# Altium PCB PCB_Project.PcbDoc
Units mil, origin at the board's own origin, x right, y up, seen from the top; angles counter-clockwise.
Board outline 2435 x 1745 mil, 2 copper layers (Top Layer, Bottom Layer); 17 components, 7 nets, 39 pads, 0 vias.
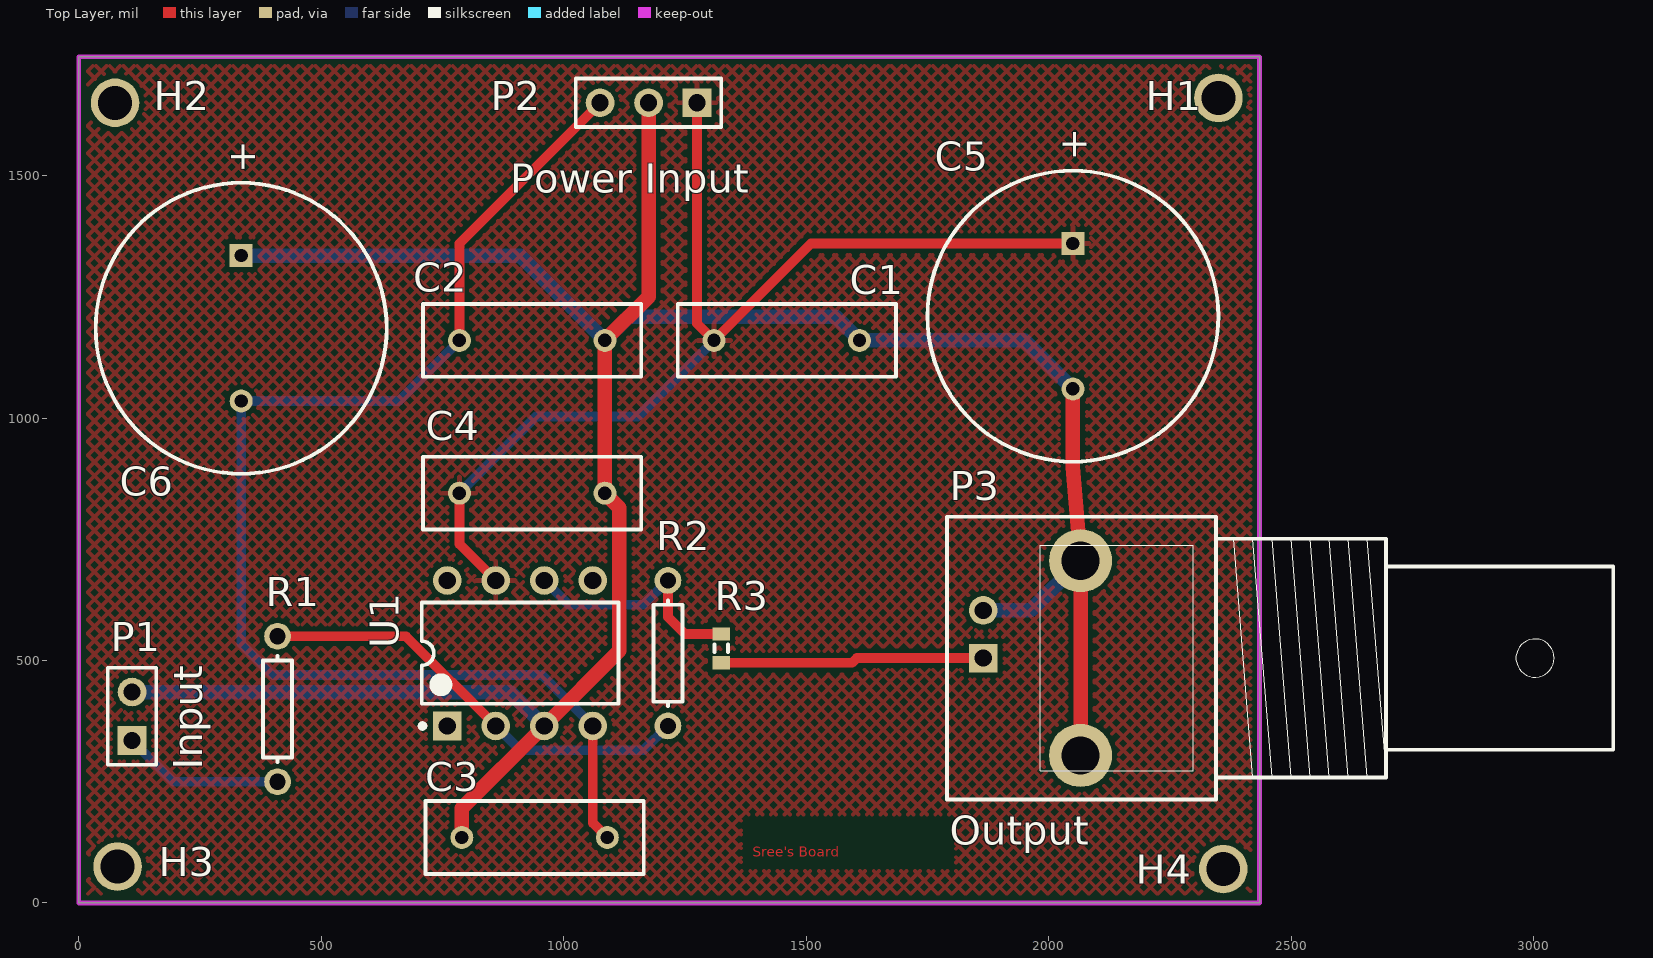
[diagram p0: Top Layer view]
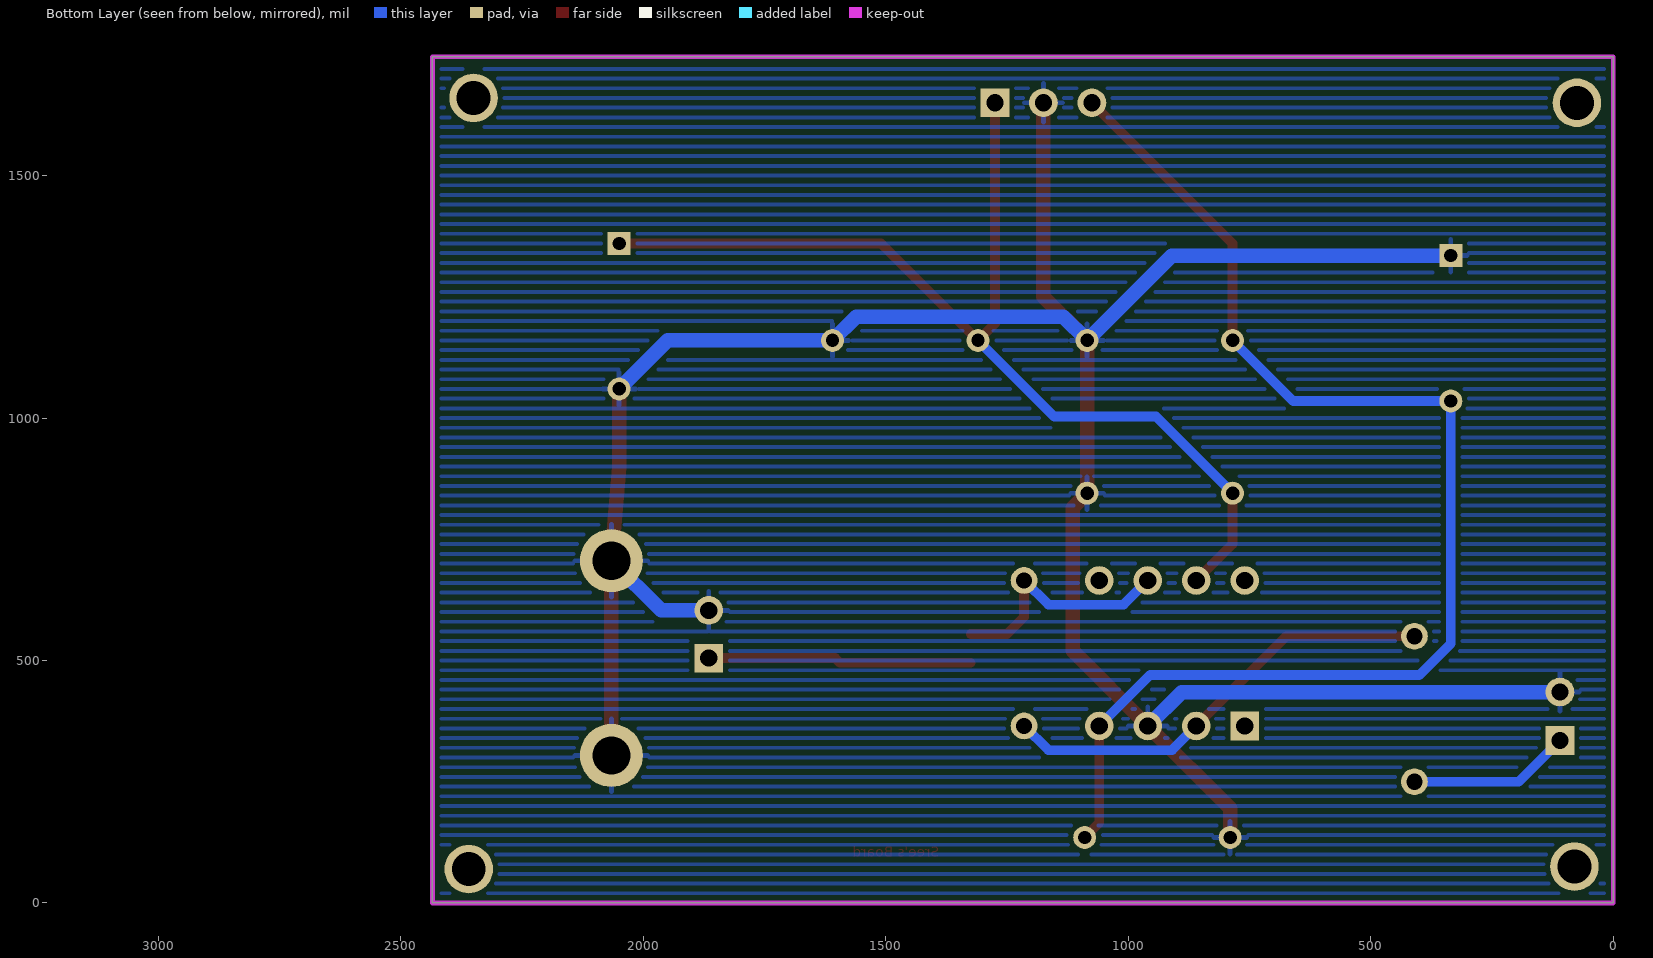
[diagram p1: Bottom Layer view, seen from below]

## Layer stack, top to bottom
Top Solder: solder mask 0.4, Solder Resist, Dk 3.5
Top Layer: signal copper 1.4
Dielectric 1: dielectric 12.6, FR-4, Dk 4.8
Bottom Layer: signal copper 1.4
Bottom Solder: solder mask 0.4, Solder Resist, Dk 3.5

## Board outline
0,0 2435,0 2435,1745 0,1745

## Design rules (kind name [scope] priority, off if disabled: settings)
Clearance Clearance_1 [All] p1: gap=10 ignorepadtopadclearanceinfootprint=FALSE
PolygonConnect [All] p1: connectstyle=Relief reliefconductorwidth=10 reliefentries=4 polygonreliefangle="90 Angle" airgapwidth=10
RoutingVias [All] p1: holewidth=28 width=50 viastyle="Through Hole" minholewidth=28 minwidth=50 maxholewidth=28 maxwidth=50
SolderMaskExpansion [All] p1: expansion=4 istentingtop=FALSE
SupplyNets "Schematic Supply Nets_2" [InNet('-9VDC')] p1: voltage=0.000
SupplyNets "Schematic Supply Nets_1" [InNet('GND')] p2: voltage=0.000
SupplyNets "Schematic Supply Nets" [InNet('+9VDC')] p3: voltage=0.000
Width "Schematic Width Constraint" [InNet('GND')] p1: maxlimit=30 minlimit=30 preferedwidth=30 minimp=50.000000 maximp=50.000000 favimp=50.000000
Width [All] p2: maxlimit=20 minlimit=20 preferedwidth=20 minimp=50.000000 maximp=50.000000 favimp=50.000000
30 further rules are at their usual default settings.

## Components (designator, comment, footprint, x,y, rotation, side; value= is the part's Value field where it differs from the comment)
C1 "Cap" RAD-0.3 1460,1160 r0 top value=100nF
C2 "Cap" RAD-0.3 935,1160 r0 top value=100nF
C3 "Cap" RAD-0.3 940,135 r0 top value=100nF
C4 "Cap" RAD-0.3 935,845 r180 top value=100nF
C5 "Cap Pol1" RB7.6-15 2050,1210 r90 top value=100pF
C6 "Cap Pol1" RB7.6-15 335,1185 r90 top value=100pF
H1 "Hole 3mm" "Hole 3mm" 2740,1485 r0 top
H2 "Hole 3mm" "Hole 3mm" 465,1475 r0 top
H3 "Hole 3mm" "Hole 3mm" 470,-100 r0 top
H4 "Hole 3mm" "Hole 3mm" 2750,-105 r0 top
P1 "Input" HDR1X2 110,335 r90 top
P2 "Power Input" HDR1X3 1275,1650 r180 top
P3 "Output" "BNC_RA CON" 1865,505 r180 top
R1 "Res1" AXIAL-0.3 410,400 r90 top value=1K
R2 "Res1" AXIAL-0.3 1215,515 r90 top value=10K
R3 "Res3" J1-0603 1325,525 r270 top value=50
U1 "LM741" DIP-8 910,515 r90 top

## Footprints (in the part's own frame and the unit in brackets; to place one, negate y for a bottom-side part, rotate by r counter-clockwise, add the part's x,y. Pads: shape width x height; smd on the part's side, far side on the other; paste and mask are expansions set on the pad)
AXIAL-0.3 [mm] "Axial Device, Thru-Hole; 2 Leads; 0.3 in Pin Spacing"
  round 1.4 hole 0.85: 1(-3.81,0) 2(3.81,0)
  silkscreen extent -2.77,-0.76 2.77,0.76
"BNC_RA CON" [mm] "Connector; BNC Elbow"
  rect 1.5x1.5 hole 0.9: 1(0,0)
  round 3.3 hole 2: 2(-5.1,5.1) 2(-5.1,-5.1)
  round 1.5 hole 0.9: 2(0,-2.5)
  silkscreen extent -33,-7.4 1.9,7.4
DIP-8 [mm]
  rect 1.5x1.5 hole 0.9: 1(-3.81,3.81)
  round 1.5 hole 0.9: 2(-3.81,1.27) 3(-3.81,-1.27) 4(-3.81,-3.81) 5(3.81,-3.81) 6(3.81,-1.27) 7(3.81,1.27) 8(3.81,3.81)
  silkscreen extent -3.93,-5.15 2.65,5.23, body extent -3.6,-5.15 3.6,5.15, height 5.08
HDR1X2 [mm] "Connector; Header; 2 Position"
  rect 1.5x1.5 hole 0.9: 1(0,0)
  round 1.5 hole 0.9: 2(2.54,0)
  silkscreen extent -1.27,-1.27 3.81,1.27
HDR1X3 [mm] "Connector; Header; 3 Position"
  rect 1.5x1.5 hole 0.9: 1(0,0)
  round 1.5 hole 0.9: 2(2.54,0) 3(5.08,0)
  silkscreen extent -1.27,-1.27 6.35,1.27
"Hole 3mm" [mil]
  round 100 hole 70: 1(-390,175)
J1-0603 [mm] "Chip Resistor, Body 1.6x0.8mm, IPC High Density"
  rect 0.7x0.9 smd: 1(-0.75,0) 2(0.75,0)
  silkscreen extent -0.2,-0.35 0.2,0.35, body extent -0.85,-0.48 0.85,0.48, height 0.9
RAD-0.3 [mm] "Radial Cap, Thru-Hole; 2 Leads; 0.3 in Pin Spacing"
  round 1.2 hole 0.7: 1(-3.81,0) 2(3.81,0)
  silkscreen extent -5.71,-1.91 5.71,1.91
RB7.6-15 [mm] "Polarized Capacitor (Radial); 2 Leads"
  rect 1.2x1.2 hole 0.7: 1(3.81,0)
  round 1.2 hole 0.7: 2(-3.81,0)
  silkscreen extent -7.62,-7.62 7.62,7.62

## Part data
C1 C2 C3 C4: "Capacitor", LatestRevisionDate=17-Jul-2002, LatestRevisionNote="Re-released for DXP Platform.", PackageDescription="Radial Cap, Thru-Hole; 2 Leads; 0.3 in Pin Spacing", PackageReference=RAD-0.3, Published=8-Jun-2000, Publisher="Altium Limited"
C5 C6: "Polarized Capacitor (Radial)", LatestRevisionDate=17-Jul-2002, LatestRevisionNote="Re-released for DXP Platform.", PackageDescription="Polarized Capacitor (Radial); 2 Leads", PackageReference=RB7.6-15, Published=8-Jun-2000, Publisher="Altium Limited"
P1: library part "Header 2", "Header, 2-Pin", LatestRevisionDate=17-Jul-2002, LatestRevisionNote="Re-released for DXP Platform.", Publisher="Altium Limited"
P2: library part "Header 3", "Header, 3-Pin", LatestRevisionDate=17-Jul-2002, LatestRevisionNote="Re-released for DXP Platform.", Publisher="Altium Limited"
P3: library part BNC, "BNC Elbow Connector", LatestRevisionDate=17-Jul-2002, LatestRevisionNote="Re-released for DXP Platform.", Publisher="Altium Limited"
R1 R2 R3: "Resistor", Published=8-Jun-2000, Publisher="Altium Limited"
  R1 R2: LatestRevisionDate=17-Jul-2002, LatestRevisionNote="Re-released for DXP Platform.", PackageDescription="Axial Device, Thru-Hole; 2 Leads; 0.3 in Pin Spacing", PackageReference=AXIAL-0.3
  R3: LatestRevisionDate=29-May-2009, LatestRevisionNote="IPC-7351 Footprint Added.", PackageDescription="Chip Resistor", PackageReference=J1-0603
U1: library part "Op Amp", "FET Operational Amplifier", ComponentLink1Description="Manufacturer Link", ComponentLink1URL=http://www.analog.com/, DatasheetVersion="REV. B", LatestRevisionDate=17-Jul-2002, LatestRevisionNote="Re-released for DXP Platform.", PackageDescription="Can; 8 Leads; Pin Circle Dia. 5.08 mm; Lead Dia. 0.53 mm (max)", PackageReference=H-08A, PackageVersion=1990, Published=8-Jun-2000, Publisher="Altium Limited"

## Nets (pads, with @x,y where several pads share a name; then routed paths per layer and width w, separated by ;. In a path a pad name is that pad's centre, name@x,y a point inside that pad or via, vN(x,y) a via of type N, cw(c..) or ccw(c..) an arc to the next point about the centre after c; other vN are vias at no path point)
+9VDC: C1.1 C4.2 C5.1 P2.1 U1.7 | length 2193.9
  Top Layer w20: C4.2 785,740 U1.7 ; P2.1 1275,1195 C1.1 1510,1360 C5.1
  Bottom Layer w20: C4.2 943,1003 1153,1003 C1.1
-9VDC: C2.1 C3.2 C6.2 P2.3 U1.4 | length 2649.7
  Top Layer w20: C2.1 785,1360 P2.3 ; U1.4 1060,165 C3.2
  Bottom Layer w20: C2.1 660,1035 C6.2 335,535 400,470 955,470 U1.4
GND: C1.2 C2.2 C3.1 C4.1 C5.2 C6.1 P1.2 P2.2 P3.2 U1.3 | length 5447.4
  Top Layer w30: C3.1 790,195 U1.3 1115,520 1115,815 C4.1 C2.2 1175,1250 P2.2 ; C5.2 2050,898.79 2065.79,705.79 P3.2@2065.79,304.21
  Bottom Layer w30: P1.2 890,435 U1.3 ; C6.1 910,1335 C2.2 1134,1209 1561,1209 C1.2 1950,1160 C5.2 ; P3.2@1865,603.43 1963.43,603.43 P3.2@2065.79,705.79
Input: P1.1 R1.1 | length 335.2
  Bottom Layer w20: P1.1 195,250 R1.1
NetP3_1: P3.1 R3.2 | length 543.9
  Top Layer w20: R3.2 1595,495.47 1604.53,505 P3.1
NetR1_2: R1.2 R2.1 U1.2 | length 923.1
  Top Layer w20: R1.2 675,550 U1.2
  Bottom Layer w20: U1.2 910,315 1165,315 R2.1
NetR2_2: R2.2 R3.1 U1.6 | length 496.4
  Top Layer w20: R2.2 1215,589.53 1250,554.53 R3.1
  Bottom Layer w20: U1.6 1010,615 1165,615 R2.2
pads on no net: H1.1 H2.1 H3.1 H4.1 U1.1 U1.5 U1.8

## Polygon pours and split planes (outlines as drawn)
GND on Bottom Layer "GND_L02_P000" (hatched Horizontal grid 20 track 8, pour order 0): 0,0 0,1745 2435,1745 2435,0
+9VDC on Top Layer "+9VDC_L01_P001" (hatched 45Degree grid 20 track 8, pour order 1): 0,0 0,1745 2435,1745 2435,0

## Keep-outs
Keep-Out Layer:
  the board outline again, w10

## Other copper
Top Layer:
  text "Sree's Board" at 1390,95 h20

## Text inside footprints (layer, text, board x,y; h text height)
C5: Top Overlay "+" at 2079.01,1530.15 h59.06 r90
C6: Top Overlay "+" at 364.01,1505.15 h59.06 r90